# Altium PCB ESP.PcbDoc
Units mil, origin at the board's own origin, x right, y up, seen from the top; angles counter-clockwise.
Board outline 5735 x 8425 mil, 2 copper layers (Top Layer, Bottom Layer); 72 components, 16 nets, 372 pads, 0 vias.
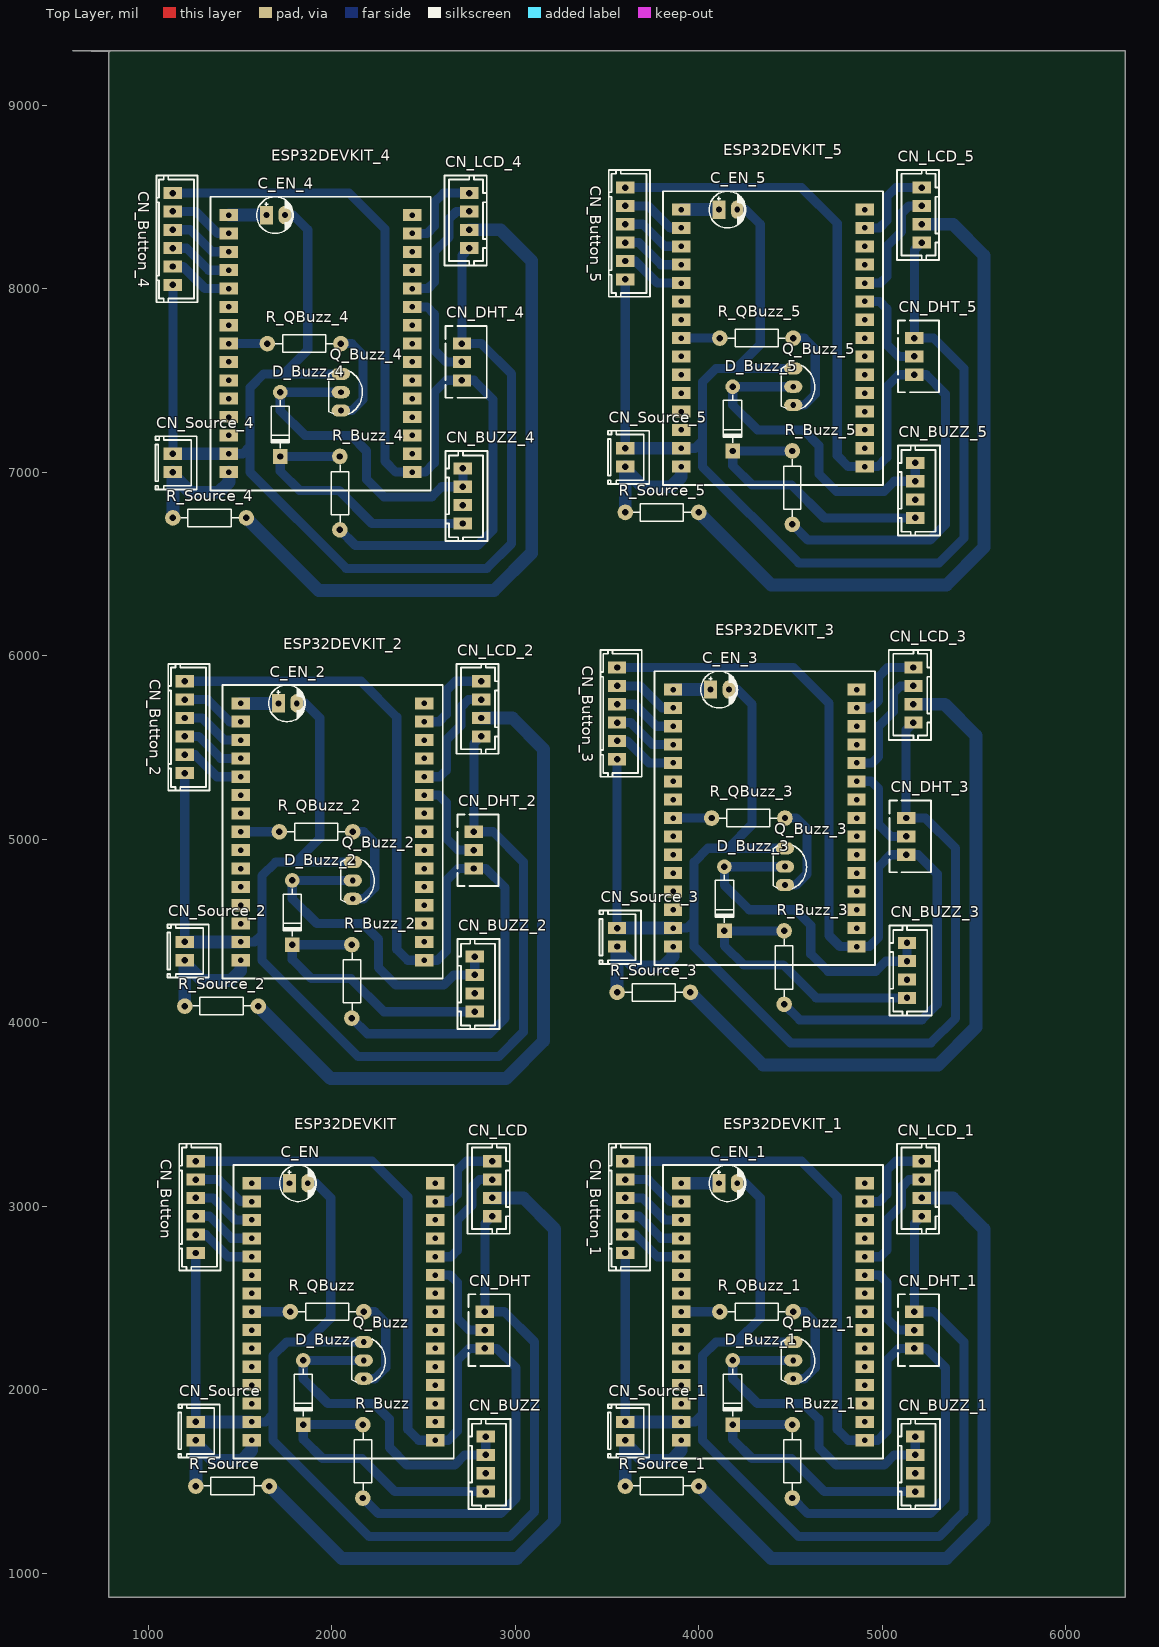
[diagram p0: Top Layer view]
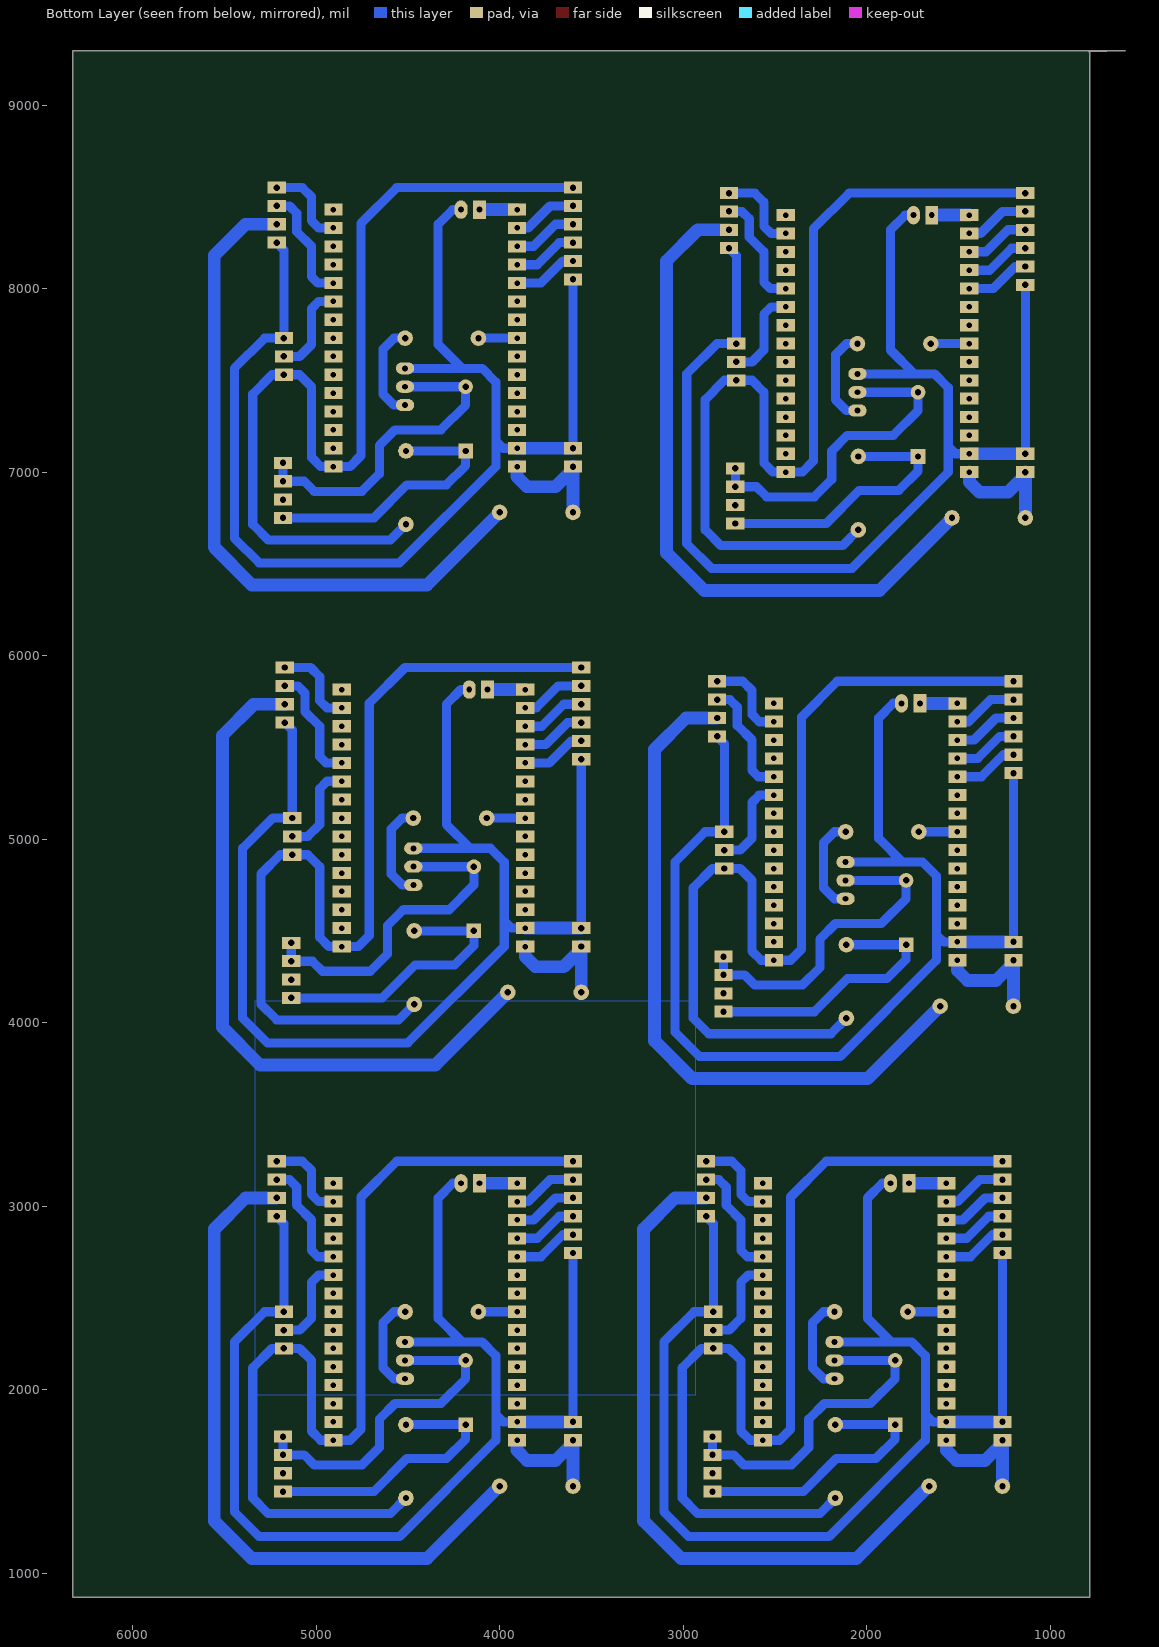
[diagram p1: Bottom Layer view, seen from below]
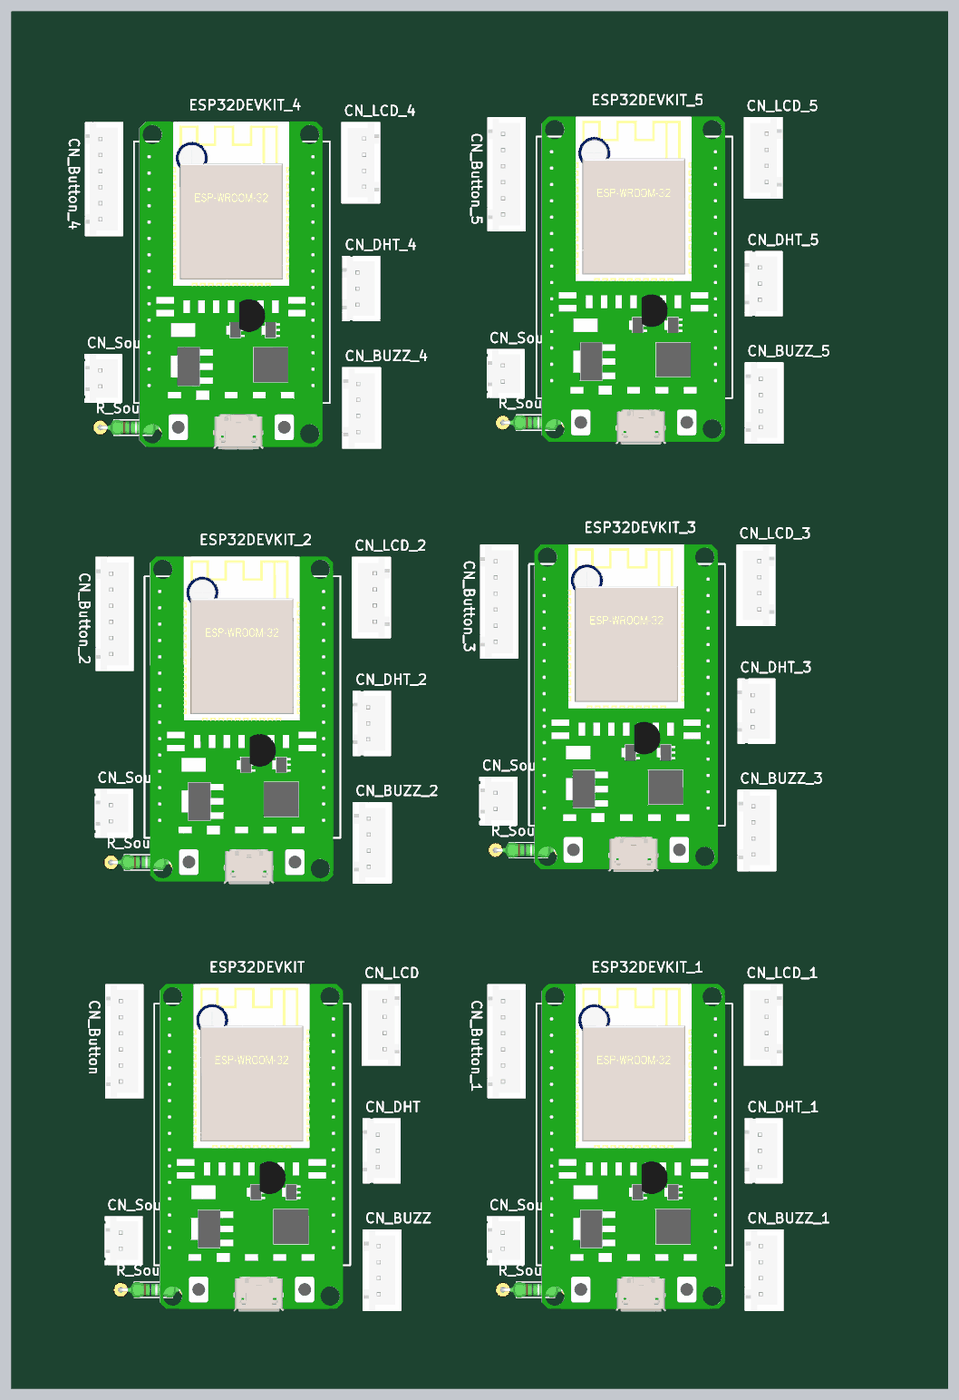
[diagram p2: 3D render of the assembled board from above, using the file's embedded part models]

## Layer stack, top to bottom
Top Solder: solder mask 0.4, Solder Resist, Dk 3.5
Top Layer: signal copper 1.4
Dielectric 1: dielectric 12.6, FR-4, Dk 4.8
Bottom Layer: signal copper 1.4
Bottom Solder: solder mask 0.4, Solder Resist, Dk 3.5

## Board outline
590,9295 6325,9295 6325,870 785,870 785,9295 785,9290 790,9290

## Design rules (kind name [scope] priority, off if disabled: settings)
Clearance [All] p1: gap=10 ignorepadtopadclearanceinfootprint=FALSE except(5: Arc-SMDPad Arc-THPad Arc-Via Arc-Fill Arc-Poly Arc-Region Track-SMDPad Track-THPad Track-Via Track-Fill Track-Poly Track-Region SMDPad-SMDPad SMDPad-THPad SMDPad-Via SMDPad-Fill SMDPad-Poly SMDPad-Region; 15: Arc-Hole Track-Hole SMDPad-Hole THPad-Hole Via-Hole Fill-Hole Poly-Hole Region-Hole Text-Hole)
PolygonConnect [All] p1: connectstyle=Relief reliefconductorwidth=10 reliefentries=4 polygonreliefangle="90 Angle" airgapwidth=10
RoutingLayers [All] p1: top layer_v5=FALSE bottom layer_v5=TRUE
RoutingVias [All] p1: holewidth=28 width=50 viastyle="Through Hole" minholewidth=28 minwidth=50 maxholewidth=28 maxwidth=50
SolderMaskExpansion [All] p1: expansion=4
Width [All] p1: maxlimit=70 minlimit=30 preferedwidth=50
29 further rules are at their usual default settings.

## Classes and differential pairs
component class ESP: C_EN CN_Button CN_BUZZ CN_DHT CN_LCD CN_Source D_Buzz ESP32DEVKIT Q_Buzz R_Buzz R_QBuzz R_Source

## Components (designator, comment, footprint, x,y, rotation, side; value= is the part's Value field where it differs from the comment)
C_EN "10uF" CP1/2 1770,3125 r0 top value=10uF/50V
C_EN_1 "10uF" CP1/2 4110,3125 r0 top value=10uF/50V (schematic designator C_EN)
C_EN_2 "10uF" CP1/2 1710,5740 r0 top value=10uF/50V (schematic designator C_EN)
C_EN_3 "10uF" CP1/2 4065,5815 r0 top value=10uF/50V (schematic designator C_EN)
C_EN_4 "10uF" CP1/2 1645,8400 r0 top value=10uF/50V (schematic designator C_EN)
C_EN_5 "10uF" CP1/2 4110,8430 r0 top value=10uF/50V (schematic designator C_EN)
CN_Button "IO" CON.HD1X6H 1260,2745 r90 top
CN_Button_1 "IO" CON.HD1X6H 3600,2745 r90 top (schematic designator CN_Button)
CN_Button_2 "IO" CON.HD1X6H 1200,5360 r90 top (schematic designator CN_Button)
CN_Button_3 "IO" CON.HD1X6H 3555,5435 r90 top (schematic designator CN_Button)
CN_Button_4 "IO" CON.HD1X6H 1135,8020 r90 top (schematic designator CN_Button)
CN_Button_5 "IO" CON.HD1X6H 3600,8050 r90 top (schematic designator CN_Button)
CN_BUZZ "IO" CON.HDR1X4L 2840,1445 r90 top
CN_BUZZ_1 "IO" CON.HDR1X4L 5180,1445 r90 top (schematic designator CN_BUZZ)
CN_BUZZ_2 "IO" CON.HDR1X4L 2780,4060 r90 top (schematic designator CN_BUZZ)
CN_BUZZ_3 "IO" CON.HDR1X4L 5135,4135 r90 top (schematic designator CN_BUZZ)
CN_BUZZ_4 "IO" CON.HDR1X4L 2715,6720 r90 top (schematic designator CN_BUZZ)
CN_BUZZ_5 "IO" CON.HDR1X4L 5180,6750 r90 top (schematic designator CN_BUZZ)
CN_DHT "IO" CON.HDR1X3 2835,2225 r90 top
CN_DHT_1 "IO" CON.HDR1X3 5175,2225 r90 top (schematic designator CN_DHT)
CN_DHT_2 "IO" CON.HDR1X3 2775,4840 r90 top (schematic designator CN_DHT)
CN_DHT_3 "IO" CON.HDR1X3 5130,4915 r90 top (schematic designator CN_DHT)
CN_DHT_4 "IO" CON.HDR1X3 2710,7500 r90 top (schematic designator CN_DHT)
CN_DHT_5 "IO" CON.HDR1X3 5175,7530 r90 top (schematic designator CN_DHT)
CN_LCD "IO" CON.HDR1X4L 2875,3245 r270 top
CN_LCD_1 "IO" CON.HDR1X4L 5215,3245 r270 top (schematic designator CN_LCD)
CN_LCD_2 "IO" CON.HDR1X4L 2815,5860 r270 top (schematic designator CN_LCD)
CN_LCD_3 "IO" CON.HDR1X4L 5170,5935 r270 top (schematic designator CN_LCD)
CN_LCD_4 "IO" CON.HDR1X4L 2750,8520 r270 top (schematic designator CN_LCD)
CN_LCD_5 "IO" CON.HDR1X4L 5215,8550 r270 top (schematic designator CN_LCD)
CN_Source "IO" CON.HDR1X2A 1260.28,1725.44 r90 top
CN_Source_1 "IO" CON.HDR1X2A 3600.28,1725.44 r90 top (schematic designator CN_Source)
CN_Source_2 "IO" CON.HDR1X2A 1200.28,4340.44 r90 top (schematic designator CN_Source)
CN_Source_3 "IO" CON.HDR1X2A 3555.28,4415.44 r90 top (schematic designator CN_Source)
CN_Source_4 "IO" CON.HDR1X2A 1135.28,7000.44 r90 top (schematic designator CN_Source)
CN_Source_5 "IO" CON.HDR1X2A 3600.28,7030.44 r90 top (schematic designator CN_Source)
D_Buzz "1N4007" D1A 1845,2160 r90 top
D_Buzz_1 "1N4007" D1A 4185,2160 r90 top (schematic designator D_Buzz)
D_Buzz_2 "1N4007" D1A 1785,4775 r90 top (schematic designator D_Buzz)
D_Buzz_3 "1N4007" D1A 4140,4850 r90 top (schematic designator D_Buzz)
D_Buzz_4 "1N4007" D1A 1720,7435 r90 top (schematic designator D_Buzz)
D_Buzz_5 "1N4007" D1A 4185,7465 r90 top (schematic designator D_Buzz)
ESP32DEVKIT "ESP32DEVKIT" ESP32devKitV1 2065,2525 r0 top
ESP32DEVKIT_1 "ESP32DEVKIT" ESP32devKitV1 4405,2525 r0 top (schematic designator ESP32DEVKIT)
ESP32DEVKIT_2 "ESP32DEVKIT" ESP32devKitV1 2005,5140 r0 top (schematic designator ESP32DEVKIT)
ESP32DEVKIT_3 "ESP32DEVKIT" ESP32devKitV1 4360,5215 r0 top (schematic designator ESP32DEVKIT)
ESP32DEVKIT_4 "ESP32DEVKIT" ESP32devKitV1 1940,7800 r0 top (schematic designator ESP32DEVKIT)
ESP32DEVKIT_5 "ESP32DEVKIT" ESP32devKitV1 4405,7830 r0 top (schematic designator ESP32DEVKIT)
Q_Buzz "C1815" QTO-92 2175,2160 r270 top
Q_Buzz_1 "C1815" QTO-92 4515,2160 r270 top (schematic designator Q_Buzz)
Q_Buzz_2 "C1815" QTO-92 2115,4775 r270 top (schematic designator Q_Buzz)
Q_Buzz_3 "C1815" QTO-92 4470,4850 r270 top (schematic designator Q_Buzz)
Q_Buzz_4 "C1815" QTO-92 2050,7435 r270 top (schematic designator Q_Buzz)
Q_Buzz_5 "C1815" QTO-92 4515,7465 r270 top (schematic designator Q_Buzz)
R_Buzz "120" RES-1/4W 2175,1625 r90 top
R_Buzz_1 "120" RES-1/4W 4515,1625 r90 top (schematic designator R_Buzz)
R_Buzz_2 "120" RES-1/4W 2115,4240 r90 top (schematic designator R_Buzz)
R_Buzz_3 "120" RES-1/4W 4470,4315 r90 top (schematic designator R_Buzz)
R_Buzz_4 "120" RES-1/4W 2050,6900 r90 top (schematic designator R_Buzz)
R_Buzz_5 "120" RES-1/4W 4515,6930 r90 top (schematic designator R_Buzz)
R_QBuzz "4k7" RES-1/4W 1990,2420 r0 top
R_QBuzz_1 "4k7" RES-1/4W 4330,2420 r0 top (schematic designator R_QBuzz)
R_QBuzz_2 "4k7" RES-1/4W 1930,5035 r0 top (schematic designator R_QBuzz)
R_QBuzz_3 "4k7" RES-1/4W 4285,5110 r0 top (schematic designator R_QBuzz)
R_QBuzz_4 "4k7" RES-1/4W 1865,7695 r0 top (schematic designator R_QBuzz)
R_QBuzz_5 "4k7" RES-1/4W 4330,7725 r0 top (schematic designator R_QBuzz)
R_Source "20" RES-1/4W 1445,1480 r180 top
R_Source_1 "20" RES-1/4W 3785,1480 r180 top (schematic designator R_Source)
R_Source_2 "20" RES-1/4W 1385,4095 r180 top (schematic designator R_Source)
R_Source_3 "20" RES-1/4W 3740,4170 r180 top (schematic designator R_Source)
R_Source_4 "20" RES-1/4W 1320,6755 r180 top (schematic designator R_Source)
R_Source_5 "20" RES-1/4W 3785,6785 r180 top (schematic designator R_Source)

## Footprints (in the part's own frame and the unit in brackets; to place one, negate y for a bottom-side part, rotate by r counter-clockwise, add the part's x,y. Pads: shape width x height; smd on the part's side, far side on the other; paste and mask are expansions set on the pad)
CON.HD1X6H [mil]
  rect 66x100 hole 35: 1(0,0) 2(100,0) 3(200,0) 4(300,0) 5(400,0) 6(500,0)
  silkscreen extent -95,-135 595,90, body extent -93,-135 593,91, height 280
CON.HDR1X2A [mil]
  rect 66x100 hole 35: 1(-0.44,0.28) 2(99.56,0.28)
  silkscreen extent -95,-130 195,95, body extent -96,-133 196,93, height 283
CON.HDR1X3 [mil]
  rect 66x100 hole 35: 1(0,0) 2(100,0) 3(200,0)
  silkscreen extent -95,-135 295,90, body extent -95,-133 295,93, height 276
CON.HDR1X4L [mil]
  rect 66x100 hole 35: 1(0,0) 2(100,0) 3(200,0) 4(300,0)
  silkscreen extent -95,-135 395,95, body extent -94,-133 394,93, height 280
CP1/2 [mil] "Tu hoa < 22uF/16>50V"
  rect 70x100 hole 32: 1(0,0)
  oval 70x100 hole 32: 2(100,0)
  silkscreen extent -53,-100 147,100, body extent -49,-99 149,99, height 287
D1A [mil] "Diode 1A, W 100mil, L 350mil"
  round 80 hole 35: 1(0,0)
  rect 80x80 hole 35: 2(-350,0)
  silkscreen extent -305,-50 -45,50, body extent -386,-33 34,36, height 84
ESP32devKitV1 [mil]
  rect 100x66 hole 30: 1(-500,600) 2(-500,500) 3(-500,400) 4(-500,300) 5(-500,200) 6(-500,100) 7(-500,0) 8(-500,-100) 9(-500,-200) 10(-500,-300) 11(-500,-400) 12(-500,-500) 13(-500,-600) 14(-500,-700) 15(-500,-800) 16(500,-800) 17(500,-700) 18(500,-600) 19(500,-500) 20(500,-400) 21(500,-300) 22(500,-200) 23(500,-100) 24(500,0) 25(500,100) 26(500,200) 27(500,300) 28(500,400) 29(500,500) 30(500,600)
  silkscreen extent -600,-900 600,700, body extent -576,-1187 559,822, height 315
QTO-92 [mil] "TO-92"
  oval 66x100 hole 32: 1(-100,0) 2(0,0) 3(100,0)
  silkscreen extent -117,-65 120,118, body extent -109,-66 109,95, height 245
RES-1/4W [mil]
  round 85 hole 35: 1(-215,5) 2(185,5)
  silkscreen extent -173,-42 141,52, body extent -227,-42 197,52, height 95

## Part data
C_EN C_EN_1 C_EN_2 C_EN_3 C_EN_4 C_EN_5: library part CP1, "Cap P  0,1uF < 22uF , 16 - 50V", Description 1="10 => 220uF/6,3V/10V - 10uF => 100uF/16V", Description 2="0,1uF => 33uF/50V - 10uF => 22uF/63V", Description 3="0,47uF => 10uF/100V"
CN_Button CN_Button_1 CN_Button_2 CN_Button_3 CN_Button_4 CN_Button_5: library part CON.HDR1x6, "Header 1x5", ComponentLink1Description="Digikey Part link", ComponentLink2Description="Open DataSheet", ComponentLink2URL=H:\LIBRARY\LIBRARY.Datasheet\, Publisher="Hoang Nguyen"
CN_BUZZ CN_BUZZ_1 CN_BUZZ_2 CN_BUZZ_3 CN_BUZZ_4 CN_BUZZ_5 CN_LCD CN_LCD_1 CN_LCD_2 CN_LCD_3 CN_LCD_4 CN_LCD_5: library part CON.HDR1x4, "Header 1x4", ComponentLink1Description="Digikey Part link", ComponentLink2Description="Open DataSheet", ComponentLink2URL=H:\LIBRARY\LIBRARY.Datasheet\, Publisher=NKIM
CN_DHT CN_DHT_1 CN_DHT_2 CN_DHT_3 CN_DHT_4 CN_DHT_5: library part CON.HDR1x3, "Header 1x3", ComponentLink1Description="Digikey Part link", ComponentLink2Description="Open DataSheet", ComponentLink2URL=H:\LIBRARY\LIBRARY.Datasheet\, Publisher=NKIM
CN_Source CN_Source_1 CN_Source_2 CN_Source_3 CN_Source_4 CN_Source_5: library part CON.HDR1x2, "Header 1x2", ComponentLink1Description="Digikey Part link", ComponentLink2Description="Open DataSheet", ComponentLink2URL=H:\LIBRARY\LIBRARY.Datasheet\, Publisher="Hoang Nguyen"
D_Buzz D_Buzz_1 D_Buzz_2 D_Buzz_3 D_Buzz_4 D_Buzz_5: library part D1A, "Diode 1A"
Q_Buzz Q_Buzz_1 Q_Buzz_2 Q_Buzz_3 Q_Buzz_4 Q_Buzz_5: "NPN 600mW, ECB", =C2383
R_Buzz R_Buzz_1 R_Buzz_2 R_Buzz_3 R_Buzz_4 R_Buzz_5 R_QBuzz R_QBuzz_1 R_QBuzz_2 R_QBuzz_3 R_QBuzz_4 R_QBuzz_5 R_Source R_Source_1 R_Source_2 R_Source_3 R_Source_4 R_Source_5: library part Res, "Res", Manufacturer="Generic Components", Class=Passive, Published=08/06/2000, Publisher="Altium Hobart Technology Centre", SubClass=R

## Nets (pads, with @x,y where several pads share a name; then routed paths per layer and width w, separated by ;. In a path a pad name is that pad's centre, name@x,y a point inside that pad or via, vN(x,y) a via of type N, cw(c..) or ccw(c..) an arc to the next point about the centre after c; other vN are vias at no path point)
GND: C_EN.2 CN_Button.1 CN_DHT.3 CN_LCD.4 CN_Source.2 ESP32DEVKIT.14 Q_Buzz.1 | length 6837.9
  Bottom Layer w50: CN_Source.2 CN_Button.1 ; ESP32DEVKIT.14 1640,1825 1680,1865 ; C_EN.2 1915,3125 1995,3045 1995,2390 1865,2260 ; Q_Buzz.1 1865,2260 ; CN_LCD.4 2835,2905 CN_DHT.3 2940,2425 3105,2260 3105,1335 2970,1200 2205,1200 1680,1725 1680,1865 ; 1680,1865 1680,2185 1755,2260 1865,2260
  Bottom Layer w70: CN_Source.2 ESP32DEVKIT.14
NetC_EN_1: C_EN.1 ESP32DEVKIT.1 | length 205
  Bottom Layer w70: ESP32DEVKIT.1 C_EN.1
NetCN_Button_2: CN_Button.2 ESP32DEVKIT.5 | length 354.7
  Bottom Layer w50: CN_Button.2 1315,2845 1435,2725 ESP32DEVKIT.5
NetCN_Button_3: CN_Button.3 ESP32DEVKIT.4 | length 354.7
  Bottom Layer w50: CN_Button.3 1335,2945 1455,2825 ESP32DEVKIT.4
NetCN_Button_4: CN_Button.4 ESP32DEVKIT.3 | length 354.7
  Bottom Layer w50: CN_Button.4 1355,3045 1475,2925 ESP32DEVKIT.3
NetCN_Button_5: CN_Button.5 ESP32DEVKIT.2 | length 354.7
  Bottom Layer w50: CN_Button.5 1385,3145 1505,3025 ESP32DEVKIT.2
NetCN_BUZZ_1: CN_BUZZ.1 D_Buzz.2 R_Buzz.2 | length 1518.1
  Bottom Layer w50: R_Buzz.2 D_Buzz.2 1845,1730 1950,1625 2165,1625 2345,1445 CN_BUZZ.1
NetCN_BUZZ_3: CN_BUZZ.3 CN_BUZZ.4 D_Buzz.1 Q_Buzz.2 | length 1833.3
  Bottom Layer w50: Q_Buzz.2 D_Buzz.1 1845,2060 1980,1925 2230,1925 2315,1840 2315,1685 2410,1590 2670,1590 2725,1645 CN_BUZZ.3 CN_BUZZ.4
NetCN_DHT_2: CN_DHT.2 ESP32DEVKIT.25 | length 508.5
  Bottom Layer w50: ESP32DEVKIT.25 2645,2625 2685,2585 2685,2390 2750,2325 CN_DHT.2
NetCN_LCD_1: CN_LCD.1 ESP32DEVKIT.29 | length 477.3
  Bottom Layer w50: ESP32DEVKIT.29 2645,3025 2685,3065 2685,3195 2735,3245 CN_LCD.1
NetCN_LCD_2: CN_LCD.2 ESP32DEVKIT.26 | length 639.2
  Bottom Layer w50: ESP32DEVKIT.26 2650,2725 2685,2760 2685,2925 2765,3005 2765,3105 2805,3145 CN_LCD.2
NetCN_LCD_3: CN_LCD.3 R_Source.1 | length 3803.9
  Bottom Layer w70: R_Source.1 2055,1080 3010,1080 3215,1285 3215,2875 3045,3045 CN_LCD.3
NetCN_Source_1: CN_Source.1 ESP32DEVKIT.15 R_Source.2 | length 672.1
  Bottom Layer w70: R_Source.2 CN_Source.1@1260,1710 ; CN_Source.1 CN_Source.1@1260,1710 ; ESP32DEVKIT.15 1565,1670 1510,1615 1355,1615 CN_Source.1@1260,1710
NetESP32DEVKIT_8: ESP32DEVKIT.8 R_QBuzz.1 | length 210
  Bottom Layer w50: ESP32DEVKIT.8 R_QBuzz.1
NetQ_Buzz_3: Q_Buzz.3 R_QBuzz.2 | length 534.7
  Bottom Layer w50: Q_Buzz.3 2235,2060 2295,2120 2295,2365 2235,2425 R_QBuzz.2
VCC: CN_Button.6 CN_DHT.1 ESP32DEVKIT.16 R_Buzz.1 | length 5207.2
  Bottom Layer w50: CN_Button.6 2220,3245 2415,3050 2415,1785 2475,1725 ESP32DEVKIT.16 2635,1725 2685,1775 2685,2160 2750,2225 CN_DHT.1 2900,2225 3005,2120 3005,1410 2920,1325 2255,1325 R_Buzz.1
pads on no net: C_EN_1.1 C_EN_1.2 C_EN_2.1 C_EN_2.2 C_EN_3.1 C_EN_3.2 C_EN_4.1 C_EN_4.2 C_EN_5.1 C_EN_5.2 CN_Button_1.1 CN_Button_1.2 CN_Button_1.3 CN_Button_1.4 CN_Button_1.5 CN_Button_1.6 CN_Button_2.1 CN_Button_2.2 CN_Button_2.3 CN_Button_2.4 CN_Button_2.5 CN_Button_2.6 CN_Button_3.1 CN_Button_3.2 CN_Button_3.3 CN_Button_3.4 CN_Button_3.5 CN_Button_3.6 CN_Button_4.1 CN_Button_4.2 CN_Button_4.3 CN_Button_4.4 CN_Button_4.5 CN_Button_4.6 CN_Button_5.1 CN_Button_5.2 CN_Button_5.3 CN_Button_5.4 CN_Button_5.5 CN_Button_5.6 CN_BUZZ.2 CN_BUZZ_1.1 CN_BUZZ_1.2 CN_BUZZ_1.3 CN_BUZZ_1.4 CN_BUZZ_2.1 CN_BUZZ_2.2 CN_BUZZ_2.3 CN_BUZZ_2.4 CN_BUZZ_3.1 CN_BUZZ_3.2 CN_BUZZ_3.3 CN_BUZZ_3.4 CN_BUZZ_4.1 CN_BUZZ_4.2 CN_BUZZ_4.3 CN_BUZZ_4.4 CN_BUZZ_5.1 CN_BUZZ_5.2 CN_BUZZ_5.3 CN_BUZZ_5.4 CN_DHT_1.1 CN_DHT_1.2 CN_DHT_1.3 CN_DHT_2.1 CN_DHT_2.2 CN_DHT_2.3 CN_DHT_3.1 CN_DHT_3.2 CN_DHT_3.3 CN_DHT_4.1 CN_DHT_4.2 CN_DHT_4.3 CN_DHT_5.1 CN_DHT_5.2 CN_DHT_5.3 CN_LCD_1.1 CN_LCD_1.2 CN_LCD_1.3 CN_LCD_1.4 CN_LCD_2.1 CN_LCD_2.2 CN_LCD_2.3 CN_LCD_2.4 CN_LCD_3.1 CN_LCD_3.2 CN_LCD_3.3 CN_LCD_3.4 CN_LCD_4.1 CN_LCD_4.2 CN_LCD_4.3 CN_LCD_4.4 CN_LCD_5.1 CN_LCD_5.2 CN_LCD_5.3 CN_LCD_5.4 CN_Source_1.1 CN_Source_1.2 CN_Source_2.1 CN_Source_2.2 CN_Source_3.1 CN_Source_3.2 CN_Source_4.1 CN_Source_4.2 CN_Source_5.1 CN_Source_5.2 D_Buzz_1.1 D_Buzz_1.2 D_Buzz_2.1 D_Buzz_2.2 D_Buzz_3.1 D_Buzz_3.2 D_Buzz_4.1 D_Buzz_4.2 D_Buzz_5.1 D_Buzz_5.2 ESP32DEVKIT.6 ESP32DEVKIT.7 ESP32DEVKIT.9 ESP32DEVKIT.10 ESP32DEVKIT.11 ESP32DEVKIT.12 ESP32DEVKIT.13 ESP32DEVKIT.17 ESP32DEVKIT.18 ESP32DEVKIT.19 ESP32DEVKIT.20 ESP32DEVKIT.21 ESP32DEVKIT.22 ESP32DEVKIT.23 ESP32DEVKIT.24 ESP32DEVKIT.27 ESP32DEVKIT.28 ESP32DEVKIT.30 ESP32DEVKIT_1.1 ESP32DEVKIT_1.2 ESP32DEVKIT_1.3 ESP32DEVKIT_1.4 ESP32DEVKIT_1.5 ESP32DEVKIT_1.6 ESP32DEVKIT_1.7 ESP32DEVKIT_1.8 ESP32DEVKIT_1.9 ESP32DEVKIT_1.10 ESP32DEVKIT_1.11 ESP32DEVKIT_1.12 ESP32DEVKIT_1.13 ESP32DEVKIT_1.14 ESP32DEVKIT_1.15 ESP32DEVKIT_1.16 ESP32DEVKIT_1.17 ESP32DEVKIT_1.18 ESP32DEVKIT_1.19 ESP32DEVKIT_1.20 ESP32DEVKIT_1.21 ESP32DEVKIT_1.22 ESP32DEVKIT_1.23 ESP32DEVKIT_1.24 ESP32DEVKIT_1.25 ESP32DEVKIT_1.26 ESP32DEVKIT_1.27 ESP32DEVKIT_1.28 ESP32DEVKIT_1.29 ESP32DEVKIT_1.30 ESP32DEVKIT_2.1 ESP32DEVKIT_2.2 ESP32DEVKIT_2.3 ESP32DEVKIT_2.4 ESP32DEVKIT_2.5 ESP32DEVKIT_2.6 ESP32DEVKIT_2.7 ESP32DEVKIT_2.8 ESP32DEVKIT_2.9 ESP32DEVKIT_2.10 ESP32DEVKIT_2.11 ESP32DEVKIT_2.12 ESP32DEVKIT_2.13 ESP32DEVKIT_2.14 ESP32DEVKIT_2.15 ESP32DEVKIT_2.16 ESP32DEVKIT_2.17 ESP32DEVKIT_2.18 ESP32DEVKIT_2.19 ESP32DEVKIT_2.20 ESP32DEVKIT_2.21 ESP32DEVKIT_2.22 ESP32DEVKIT_2.23 ESP32DEVKIT_2.24 ESP32DEVKIT_2.25 ESP32DEVKIT_2.26 ESP32DEVKIT_2.27 ESP32DEVKIT_2.28 ESP32DEVKIT_2.29 ESP32DEVKIT_2.30 ESP32DEVKIT_3.1 ESP32DEVKIT_3.2 ESP32DEVKIT_3.3 ESP32DEVKIT_3.4 ESP32DEVKIT_3.5 ESP32DEVKIT_3.6 ESP32DEVKIT_3.7 ESP32DEVKIT_3.8 ESP32DEVKIT_3.9 ESP32DEVKIT_3.10 ESP32DEVKIT_3.11 ESP32DEVKIT_3.12 ESP32DEVKIT_3.13 ESP32DEVKIT_3.14 ESP32DEVKIT_3.15 ESP32DEVKIT_3.16 ESP32DEVKIT_3.17 ESP32DEVKIT_3.18 ESP32DEVKIT_3.19 ESP32DEVKIT_3.20 ESP32DEVKIT_3.21 ESP32DEVKIT_3.22 ESP32DEVKIT_3.23 ESP32DEVKIT_3.24 ESP32DEVKIT_3.25 ESP32DEVKIT_3.26 ESP32DEVKIT_3.27 ESP32DEVKIT_3.28 ESP32DEVKIT_3.29 ESP32DEVKIT_3.30 ESP32DEVKIT_4.1 ESP32DEVKIT_4.2 ESP32DEVKIT_4.3 ESP32DEVKIT_4.4 ESP32DEVKIT_4.5 ESP32DEVKIT_4.6 ESP32DEVKIT_4.7 ESP32DEVKIT_4.8 ESP32DEVKIT_4.9 ESP32DEVKIT_4.10 ESP32DEVKIT_4.11 ESP32DEVKIT_4.12 ESP32DEVKIT_4.13 ESP32DEVKIT_4.14 ESP32DEVKIT_4.15 ESP32DEVKIT_4.16 ESP32DEVKIT_4.17 ESP32DEVKIT_4.18 ESP32DEVKIT_4.19 ESP32DEVKIT_4.20 ESP32DEVKIT_4.21 ESP32DEVKIT_4.22 ESP32DEVKIT_4.23 ESP32DEVKIT_4.24 ESP32DEVKIT_4.25 ESP32DEVKIT_4.26 ESP32DEVKIT_4.27 ESP32DEVKIT_4.28 ESP32DEVKIT_4.29 ESP32DEVKIT_4.30 ESP32DEVKIT_5.1 ESP32DEVKIT_5.2 ESP32DEVKIT_5.3 ESP32DEVKIT_5.4 ESP32DEVKIT_5.5 ESP32DEVKIT_5.6 ESP32DEVKIT_5.7 ESP32DEVKIT_5.8 ESP32DEVKIT_5.9 ESP32DEVKIT_5.10 ESP32DEVKIT_5.11 ESP32DEVKIT_5.12 ESP32DEVKIT_5.13 ESP32DEVKIT_5.14 ESP32DEVKIT_5.15 ESP32DEVKIT_5.16 ESP32DEVKIT_5.17 ESP32DEVKIT_5.18 ESP32DEVKIT_5.19 ESP32DEVKIT_5.20 ESP32DEVKIT_5.21 ESP32DEVKIT_5.22 ESP32DEVKIT_5.23 ESP32DEVKIT_5.24 ESP32DEVKIT_5.25 ESP32DEVKIT_5.26 ESP32DEVKIT_5.27 ESP32DEVKIT_5.28 ESP32DEVKIT_5.29 ESP32DEVKIT_5.30 Q_Buzz_1.1 Q_Buzz_1.2 Q_Buzz_1.3 Q_Buzz_2.1 Q_Buzz_2.2 Q_Buzz_2.3 Q_Buzz_3.1 Q_Buzz_3.2 Q_Buzz_3.3 Q_Buzz_4.1 Q_Buzz_4.2 Q_Buzz_4.3 Q_Buzz_5.1 Q_Buzz_5.2 Q_Buzz_5.3 R_Buzz_1.1 R_Buzz_1.2 R_Buzz_2.1 R_Buzz_2.2 R_Buzz_3.1 R_Buzz_3.2 R_Buzz_4.1 R_Buzz_4.2 R_Buzz_5.1 R_Buzz_5.2 R_QBuzz_1.1 R_QBuzz_1.2 R_QBuzz_2.1 R_QBuzz_2.2 R_QBuzz_3.1 R_QBuzz_3.2 R_QBuzz_4.1 R_QBuzz_4.2 R_QBuzz_5.1 R_QBuzz_5.2 R_Source_1.1 R_Source_1.2 R_Source_2.1 R_Source_2.2 R_Source_3.1 R_Source_3.2 R_Source_4.1 R_Source_4.2 R_Source_5.1 R_Source_5.2
copper on no net: | length 119329.9
  Bottom Layer w50: 1135,7100 1135,8020 ; 1135,8120 1190,8120 1310,8000 1440,8000 ; 1135,8220 1210,8220 1330,8100 1440,8100 ; 1135,8320 1230,8320 1350,8200 1440,8200 ; 1135,8420 1260,8420 1380,8300 1440,8300 ; 1135,8520 2095,8520 2290,8325 2290,7060 2350,7000 2440,7000 2510,7000 2560,7050 2560,7435 2625,7500 2710,7500 2775,7500 2880,7395 2880,6685 2795,6600 2130,6600 2045,6685 ; 1200,4440 1200,5360 ; 1200,5460 1255,5460 1375,5340 1505,5340 ; 1200,5560 1275,5560 1395,5440 1505,5440 ; 1200,5660 1295,5660 1415,5540 1505,5540 ; 1200,5760 1325,5760 1445,5640 1505,5640 ; 1200,5860 2160,5860 2355,5665 2355,4400 2415,4340 2505,4340 2575,4340 2625,4390 2625,4775 2690,4840 2775,4840 2840,4840 2945,4735 2945,4025 2860,3940 2195,3940 2110,4025 ; 1440,7100 1515,7100 1555,7140 ; 1440,7700 1650,7700 ; 1505,4440 1580,4440 1620,4480 ; 1505,5040 1715,5040 ; 1745,8400 1790,8400 1870,8320 1870,7665 1740,7535 ; 1810,5740 1855,5740 1935,5660 1935,5005 1805,4875 ; 2045,7085 1720,7085 1720,7005 1825,6900 2040,6900 2220,6720 2715,6720 ; 2050,7335 2110,7335 2170,7395 2170,7640 2110,7700 2050,7700 ; 2050,7435 1720,7435 1720,7335 1855,7200 2105,7200 2190,7115 2190,6960 2285,6865 2545,6865 2600,6920 2715,6920 2715,7020 ; 2050,7535 1740,7535 ; 2110,4425 1785,4425 1785,4345 1890,4240 2105,4240 2285,4060 2780,4060 ; 2115,4675 2175,4675 2235,4735 2235,4980 2175,5040 2115,5040 ; 2115,4775 1785,4775 1785,4675 1920,4540 2170,4540 2255,4455 2255,4300 2350,4205 2610,4205 2665,4260 2780,4260 2780,4360 ; 2115,4875 1805,4875 ; 2440,7900 2520,7900 2560,7860 2560,7665 2625,7600 2710,7600 ; 2440,8000 2525,8000 2560,8035 2560,8200 2640,8280 2640,8380 2680,8420 2750,8420 ; 2440,8300 2520,8300 2560,8340 2560,8470 2610,8520 2750,8520 ; 2505,5240 2585,5240 2625,5200 2625,5005 2690,4940 2775,4940 ; 2505,5340 2590,5340 2625,5375 2625,5540 2705,5620 2705,5720 2745,5760 2815,5760 ; 2505,5640 2585,5640 2625,5680 2625,5810 2675,5860 2815,5860 ; 2750,8220 2710,8180 2710,7700 2815,7700 2980,7535 2980,6610 2845,6475 2080,6475 1555,7000 1555,7140 ; 2815,5560 2775,5520 2775,5040 2880,5040 3045,4875 3045,3950 2910,3815 2145,3815 1620,4340 1620,4480 ; 3555,4515 3555,5435 ; 3555,5535 3610,5535 3730,5415 3860,5415 ; 3555,5635 3630,5635 3750,5515 3860,5515 ; 3555,5735 3650,5735 3770,5615 3860,5615 ; 3555,5835 3680,5835 3800,5715 3860,5715 ; 3555,5935 4515,5935 4710,5740 4710,4475 4770,4415 4860,4415 4930,4415 4980,4465 4980,4850 5045,4915 5130,4915 5195,4915 5300,4810 5300,4100 5215,4015 4550,4015 4465,4100 ; 3600,1825 3600,2745 ; 3600,2845 3655,2845 3775,2725 3905,2725 ; 3600,2945 3675,2945 3795,2825 3905,2825 ; 3600,3045 3695,3045 3815,2925 3905,2925 ; 3600,3145 3725,3145 3845,3025 3905,3025 ; 3600,3245 4560,3245 4755,3050 4755,1785 4815,1725 4905,1725 4975,1725 5025,1775 5025,2160 5090,2225 5175,2225 5240,2225 5345,2120 5345,1410 5260,1325 4595,1325 4510,1410 ; 3600,7130 3600,8050 ; 3600,8150 3655,8150 3775,8030 3905,8030 ; 3600,8250 3675,8250 3795,8130 3905,8130 ; 3600,8350 3695,8350 3815,8230 3905,8230 ; 3600,8450 3725,8450 3845,8330 3905,8330 ; 3600,8550 4560,8550 4755,8355 4755,7090 4815,7030 4905,7030 4975,7030 5025,7080 5025,7465 5090,7530 5175,7530 5240,7530 5345,7425 5345,6715 5260,6630 4595,6630 4510,6715 ; 3860,4515 3935,4515 3975,4555 ; 3860,5115 4070,5115 ; 3905,1825 3980,1825 4020,1865 ; 3905,2425 4115,2425 ; 3905,7130 3980,7130 4020,7170 ; 3905,7730 4115,7730 ; 4165,5815 4210,5815 4290,5735 4290,5080 4160,4950 ; 4210,3125 4255,3125 4335,3045 4335,2390 4205,2260 ; 4210,8430 4255,8430 4335,8350 4335,7695 4205,7565 ; 4465,4500 4140,4500 4140,4420 4245,4315 4460,4315 4640,4135 5135,4135 ; 4470,4750 4530,4750 4590,4810 4590,5055 4530,5115 4470,5115 ; 4470,4850 4140,4850 4140,4750 4275,4615 4525,4615 4610,4530 4610,4375 4705,4280 4965,4280 5020,4335 5135,4335 5135,4435 ; 4470,4950 4160,4950 ; 4510,1810 4185,1810 4185,1730 4290,1625 4505,1625 4685,1445 5180,1445 ; 4510,7115 4185,7115 4185,7035 4290,6930 4505,6930 4685,6750 5180,6750 ; 4515,2060 4575,2060 4635,2120 4635,2365 4575,2425 4515,2425 ; 4515,2160 4185,2160 4185,2060 4320,1925 4570,1925 4655,1840 4655,1685 4750,1590 5010,1590 5065,1645 5180,1645 5180,1745 ; 4515,2260 4205,2260 ; 4515,7365 4575,7365 4635,7425 4635,7670 4575,7730 4515,7730 ; 4515,7465 4185,7465 4185,7365 4320,7230 4570,7230 4655,7145 4655,6990 4750,6895 5010,6895 5065,6950 5180,6950 5180,7050 ; 4515,7565 4205,7565 ; 4860,5315 4940,5315 4980,5275 4980,5080 5045,5015 5130,5015 ; 4860,5415 4945,5415 4980,5450 4980,5615 5060,5695 5060,5795 5100,5835 5170,5835 ; 4860,5715 4940,5715 4980,5755 4980,5885 5030,5935 5170,5935 ; 4905,2625 4985,2625 5025,2585 5025,2390 5090,2325 5175,2325 ; 4905,2725 4990,2725 5025,2760 5025,2925 5105,3005 5105,3105 5145,3145 5215,3145 ; 4905,3025 4985,3025 5025,3065 5025,3195 5075,3245 5215,3245 ; 4905,7930 4985,7930 5025,7890 5025,7695 5090,7630 5175,7630 ; 4905,8030 4990,8030 5025,8065 5025,8230 5105,8310 5105,8410 5145,8450 5215,8450 ; 4905,8330 4985,8330 5025,8370 5025,8500 5075,8550 5215,8550 ; 5170,5635 5130,5595 5130,5115 5235,5115 5400,4950 5400,4025 5265,3890 4500,3890 3975,4415 3975,4555 ; 5215,2945 5175,2905 5175,2425 5280,2425 5445,2260 5445,1335 5310,1200 4545,1200 4020,1725 4020,1865 ; 5215,8250 5175,8210 5175,7730 5280,7730 5445,7565 5445,6640 5310,6505 4545,6505 4020,7030 4020,7170 ; 1555,7140 1555,7460 1630,7535 1740,7535 ; 1620,4480 1620,4800 1695,4875 1805,4875 ; 3975,4555 3975,4875 4050,4950 4160,4950 ; 4020,1865 4020,2185 4095,2260 4205,2260 ; 4020,7170 4020,7490 4095,7565 4205,7565
  Bottom Layer w70: 1135,6750 1135,6985 ; 1135,7000 1135,6985 ; 1135,7100 1440,7100 ; 1200,4090 1200,4325 ; 1200,4340 1200,4325 ; 1200,4440 1505,4440 ; 1440,7000 1440,6945 1385,6890 1230,6890 1135,6985 ; 1440,8400 1645,8400 ; 1505,4340 1505,4285 1450,4230 1295,4230 1200,4325 ; 1505,5740 1710,5740 ; 1535,6750 1930,6355 2885,6355 3090,6560 3090,8150 2920,8320 2750,8320 ; 1600,4090 1995,3695 2950,3695 3155,3900 3155,5490 2985,5660 2815,5660 ; 3555,4165 3555,4400 ; 3555,4415 3555,4400 ; 3555,4515 3860,4515 ; 3600,1475 3600,1710 ; 3600,1725 3600,1710 ; 3600,1825 3905,1825 ; 3600,6780 3600,7015 ; 3600,7030 3600,7015 ; 3600,7130 3905,7130 ; 3860,4415 3860,4360 3805,4305 3650,4305 3555,4400 ; 3860,5815 4065,5815 ; 3905,1725 3905,1670 3850,1615 3695,1615 3600,1710 ; 3905,3125 4110,3125 ; 3905,7030 3905,6975 3850,6920 3695,6920 3600,7015 ; 3905,8430 4110,8430 ; 3955,4165 4350,3770 5305,3770 5510,3975 5510,5565 5340,5735 5170,5735 ; 4000,1475 4395,1080 5350,1080 5555,1285 5555,2875 5385,3045 5215,3045 ; 4000,6780 4395,6385 5350,6385 5555,6590 5555,8180 5385,8350 5215,8350

## Polygon pours and split planes (outlines as drawn)
GND on Bottom Layer "NONET_L02_P002" (solid, shelved, pour order 2): 2935,4120 2935,1970 5330,1970 5330,4120